# Altium PCB ScienceLEDBoard.PcbDoc
Units mm, origin at the board's own origin, x right, y up, seen from the top; angles counter-clockwise.
Board outline 16.5 x 16.5 mm, 2 copper layers (Top Layer, Bottom Layer), stack 1.586 mm thick; 8 components, 6 nets, 24 pads, 16 vias.
Unrouted connection lines stored in the file: 3.
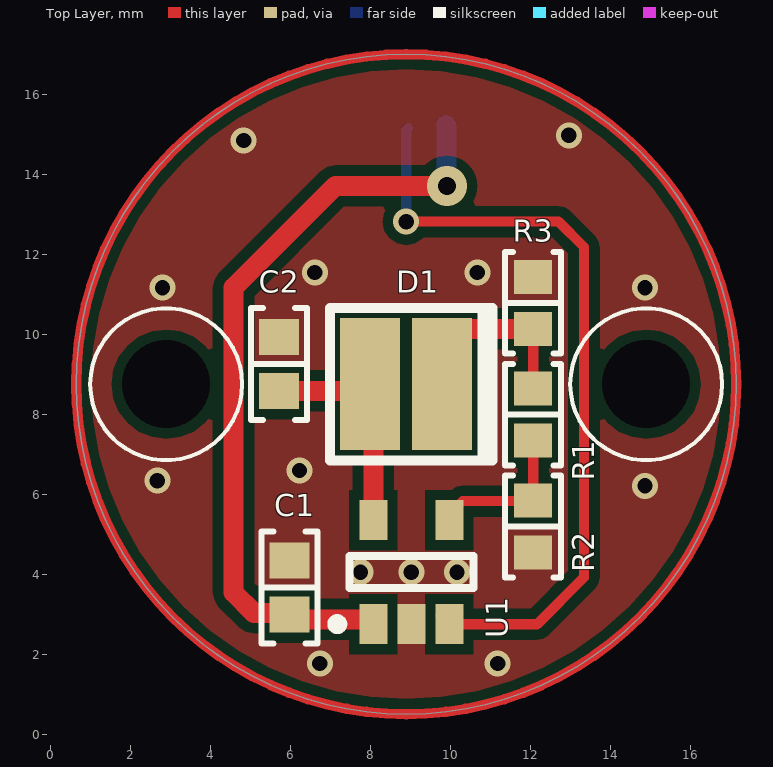
[diagram p0: Top Layer view]
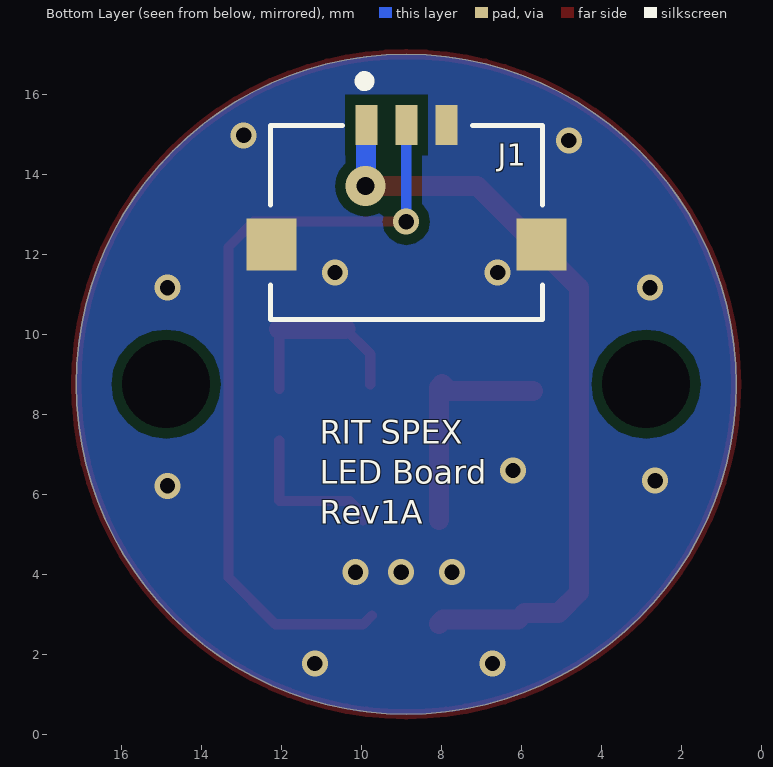
[diagram p1: Bottom Layer view, seen from below]
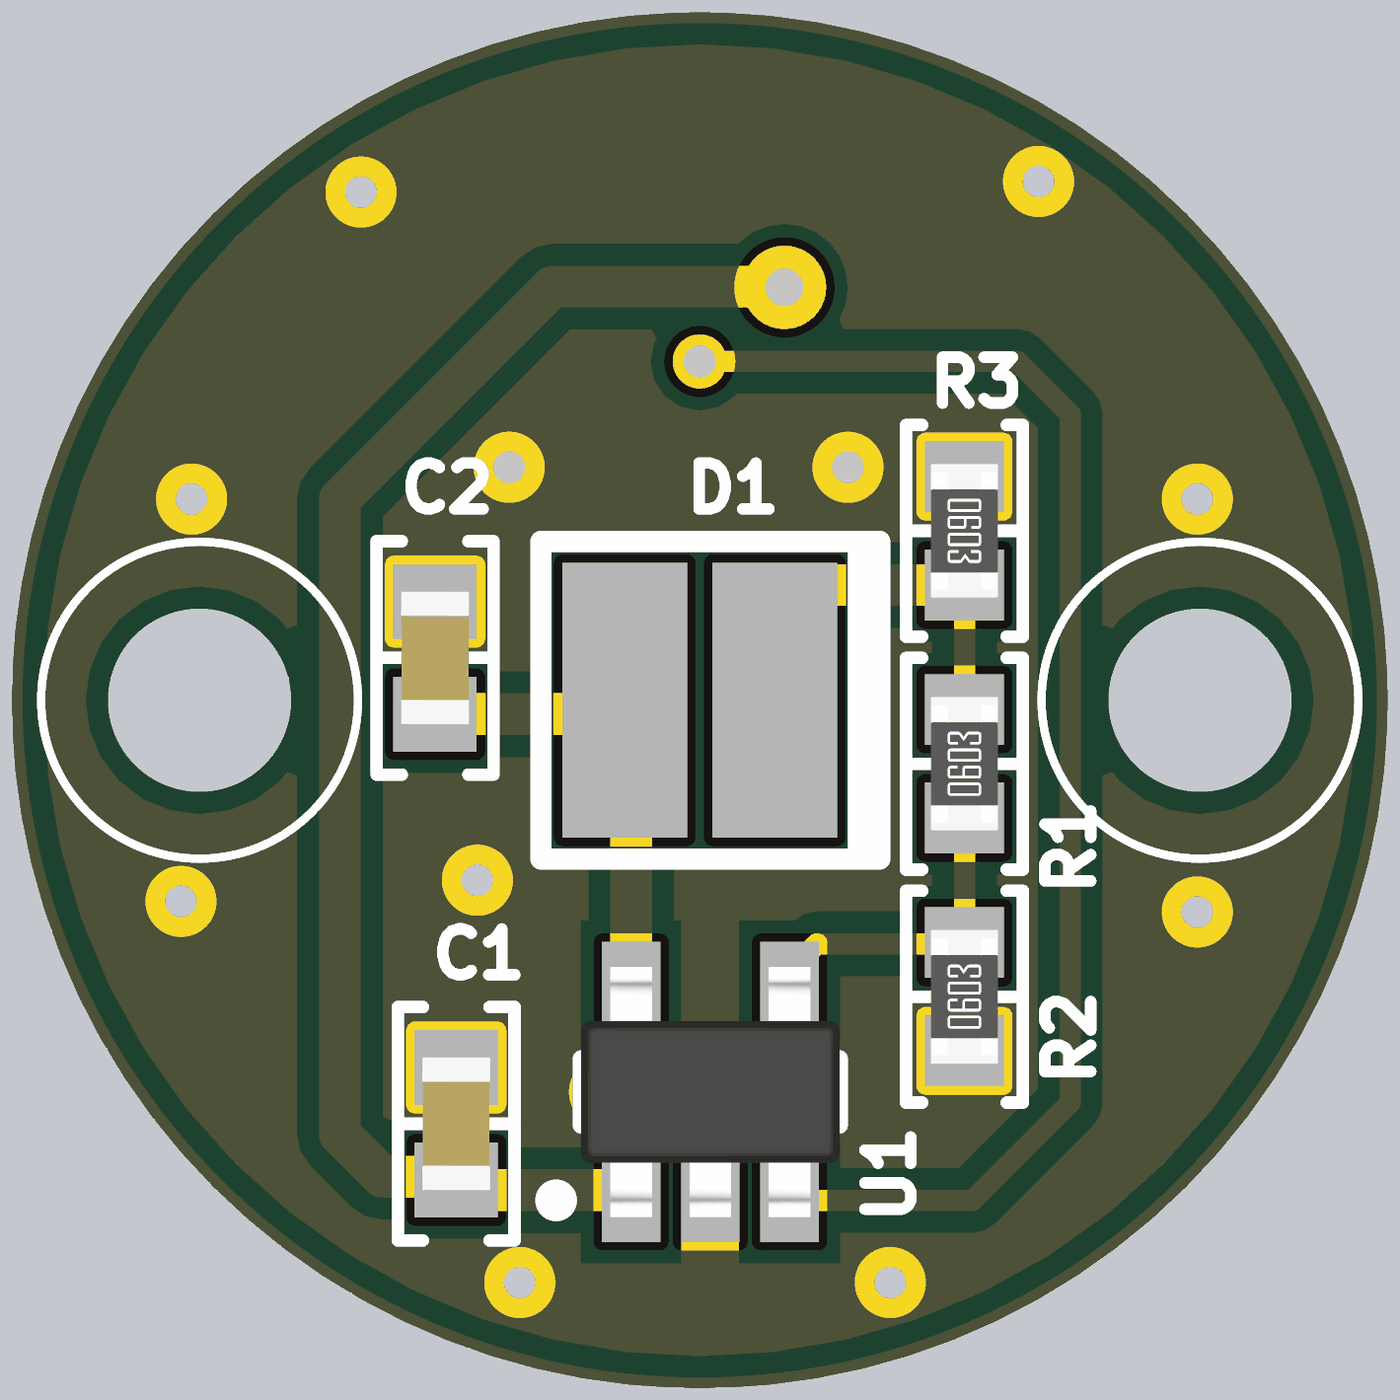
[diagram p2: 3D render of the assembled board from above, using the file's embedded part models]

## Layer stack, top to bottom
Top Solder: solder mask 0.0102, Solder Resist, Dk 3.5
Top Layer: signal copper 0.043
Dielectric 1: dielectric 1.5, FR-4, Dk 4.4
Bottom Layer: signal copper 0.043
Bottom Solder: solder mask 0.0102, Solder Resist, Dk 3.5

## Board outline
0.64,8.763 ccw(c8.89,8.763) 8.89,0.513 ccw(c8.89,8.763) 17.14,8.763 ccw(c8.89,8.763) 8.89,17.013 ccw(c8.89,8.763)

## Design rules (kind name [scope] priority, off if disabled: settings)
Clearance [All] p1: gap=0.254 ignorepadtopadclearanceinfootprint=FALSE except(0: Arc-Hole Track-Hole SMDPad-Hole THPad-Hole Via-Hole Fill-Hole Poly-Hole Region-Hole Text-Hole)
PolygonConnect [All] p1: connectstyle=Direct reliefconductorwidth=0.254 reliefentries=4 polygonreliefangle="90 Angle" airgapwidth=0.254
RoomDefinition SCIENCE_LED_BOARD [InComponentClass('SCIENCE_LED_BOARD')] p1: confinementstyle=ConfineIn formatcopy=TRUE lockcomponents=FALSE outline 0,0 17.526,0 17.526,17.272 0,17.272
RoutingVias [All] p1: holewidth=0.711 width=1.27 viastyle="Through Hole" minholewidth=0.711 minwidth=1.27 maxholewidth=0.711 maxwidth=1.27
SilkToSilkClearance [All] p1: silktosilkclearance=0.127
SilkToSolderMaskClearance [IsPad] p1: minsilkscreentomaskgap=0.127 clearancetoexposedcopper=TRUE
SolderMaskExpansion [All] p1: expansion=0.102
Width [All] p1: maxlimit=1 minlimit=0.254 preferedwidth=0.254
28 further rules are at their usual default settings.

## Components (designator, comment, footprint, x,y, rotation, side; value= is the part's Value field where it differs from the comment)
C1 "1µF" "CAP 0603_1608" 5.969,3.683 r270 top
C2 "1µF" "CAP 0603_1608" 5.715,9.271 r270 top
D1 "=VALUE" "PCB - LED - VISHAY 1414_3535 UV" 8.89,8.763 r0 top
J1 "SCH - CONNECTORS - 3 PIN + SHIELD" "PCB - CONNECTOR - MOLEX - PICO-LOCK 5037630391" 8.89,15.24 r180 bottom
R1 "7.15 kOhms" "RES 0603_1608" 12.065,8.001 r90 top
R2 "12 kOhms" "RES 0603_1608" 12.065,5.207 r90 top
R3 "47 Ohms" "RES 0603_1608" 12.065,10.795 r270 top
U1 "AP2204K-ADJTRG1" DIOD-SOT23-5_V 9.017,4.064 r90 top

## Footprints (in the part's own frame and the unit in brackets; to place one, negate y for a bottom-side part, rotate by r counter-clockwise, add the part's x,y. Pads: shape width x height; smd on the part's side, far side on the other; paste and mask are expansions set on the pad)
"CAP 0603_1608" [mm] "Chip Capacitor, 2-Leads, Body 1.60x0.80mm, IPC Medium Density"
  rect 0.9x1 smd: 1(-0.675,0) 2(0.675,0)
  silkscreen extent -1.4,-0.7 1.4,0.7, body extent -0.8,-0.41 0.8,0.41, height 0.82
DIOD-SOT23-5_V [mm] "SOT23, 5-Leads, Body 3.1x1.7mm, Pitch 0.95mm"
  rect 1x0.7 smd: 1(-1.3,0.95) 2(-1.3,0) 3(-1.3,-0.95) 4(1.3,-0.95) 5(1.3,0.95)
  silkscreen extent -1.42,-1.55 0.4,1.97, body extent -1.5,-1.55 1.5,1.55, height 1.45
"PCB - CONNECTOR - MOLEX - PICO-LOCK 5037630391" [mm]
  rect 0.55x1 smd: 1(-0.992,0) 2(0.008,0) 3(1.008,0)
  rect 1.26x1.3 smd: S1(3.383,-2.99) S2(-3.367,-2.99)
  silkscreen extent -3.39,-4.86 3.41,1.2, body extent -3.82,-4.88 3.78,0.31, height 1.47
"PCB - LED - VISHAY 1414_3535 UV" [mm] "PCB - LED - VISHAY 1414_3535 UV"
  rect 1.5x3.3 smd: 1(-0.9,0) 2(0.9,0)
  silkscreen extent -1.91,-1.91 2.16,1.91
"RES 0603_1608" [mm] "Chip Resistor, 2-Leads, Body 1.60x0.80mm, IPC Medium Density"
  rect 0.85x0.95 smd: 1(-0.65,0) 2(0.65,0)
  silkscreen extent -1.27,-0.7 1.27,0.7, body extent -0.8,-0.4 0.8,0.4, height 0.45

## Part data
C1 C2: library part CC0603KRX5R8BB105, "CAP CER 1UF 25V X5R 0603", Device Package="0603 (1608 Metric)", Manufacturer=Yageo, Operating Temperature="-55°C ~ 85°C", Supplier Part Number 1=311-1445-1-ND, Temperature Coefficient=X5R, Tolerance=±10%, Voltage - Rated=25V, Applications="General Purpose", Capacitance=1µF, ComponentLink1Description=Datasheet, ComponentLink1URL=https://www.yageo.com/upload/media/product/productsearch/datasheet/mlcc/UPY-GPHC_X5R_4V-to-50V_25.pdf, ComponentLink2Description="DigiKey Link", ComponentLink2URL=http://digikey.com/product-detail/en/yageo/CC0603KRX5R8BB105/311-1445-1-ND/2833751, LastUpdated="1/21/2020 12:02:05 AM", Lifecycle Status=Active, Minimum Order=1, Mounting Type="Surface Mount, MLCC", Package / Case="0603 (1608 Metric)", Packaging=TapeAndReel, PartId=5146, Part Number=CC0603KRX5R8BB105, Part Status=Active, Price=0.01, Series=CC, Size / Dimension="0.063\" L x 0.031\" W (1.60mm x 0.80mm)", Supplier 1=DigiKey, Thickness (Max)="0.035\" (0.90mm)"
D1: library part LED, "Chip LED"
J1: "Connector Header Surface Mount, Right Angle 4 position 0.039 _1.00mm_", Package=None, Availability=Unavailable, MF=Molex, MP=5037630491, Price=None, SnapEDA_Link=https://www.snapeda.com/parts/5037630491/Molex/view-part/3215405/?ref=snap
R1: library part RMCF0603FT7K15, "RES 7.15K OHM 1% 1/10W 0603", Device Package="0603 (1608 Metric)", Manufacturer="Stackpole Electronics Inc", Operating Temperature="-55°C ~ 155°C", Power (Watts)="0.1W, 1/10W", Ratings=AEC-Q200, Supplier Device Package=0603, Supplier Part Number 1=RMCF0603FT7K15CT-ND, Temperature Coefficient=±100ppm/°C, Tolerance=±1%, ComponentLink1Description=Datasheet, ComponentLink1URL=https://www.seielect.com/catalog/sei-packaging.pdf, ComponentLink2Description="DigiKey Link", ComponentLink2URL=http://digikey.com/product-detail/en/stackpole-electronics-inc/RMCF0603FT7K15/RMCF0603FT7K15CT-ND/1943048, Composition="Thick Film", Features="Automotive AEC-Q200", Height - Seated (Max)="0.022\" (0.55mm)", LastUpdated="1/21/2020 12:17:41 AM", Lifecycle Status=Active, Minimum Order=1, Number of Terminations=2, Package / Case="0603 (1608 Metric)", Packaging=CutTape, PartId=22551, Part Number=RMCF0603FT7K15, Part Status=Active, Price=0.10, Resistance="7.15 kOhms", Series=RMCF, Size / Dimension="0.061\" L x 0.031\" W (1.55mm x 0.80mm)", Supplier 1=DigiKey
R2: library part RMCF0603FT12K0, "RES 12K OHM 1% 1/10W 0603", Device Package="0603 (1608 Metric)", Manufacturer="Stackpole Electronics Inc", Operating Temperature="-55°C ~ 155°C", Power (Watts)="0.1W, 1/10W", Ratings=AEC-Q200, Supplier Device Package=0603, Supplier Part Number 1=RMCF0603FT12K0CT-ND, Temperature Coefficient=±100ppm/°C, Tolerance=±1%, ComponentLink1Description=Datasheet, ComponentLink1URL=https://www.seielect.com/catalog/sei-rmcf_rmcp.pdf, ComponentLink2Description="DigiKey Link", ComponentLink2URL=http://digikey.com/product-detail/en/stackpole-electronics-inc/RMCF0603FT12K0/RMCF0603FT12K0CT-ND/1943062, Composition="Thick Film", Features="Automotive AEC-Q200", Height - Seated (Max)="0.022\" (0.55mm)", LastUpdated="1/21/2020 12:22:42 AM", Lifecycle Status=Active, Minimum Order=1, Number of Terminations=2, Package / Case="0603 (1608 Metric)", Packaging=CutTape, PartId=10636, Part Number=RMCF0603FT12K0, Part Status=Active, Price=0.10, Resistance="12 kOhms", Series=RMCF, Size / Dimension="0.061\" L x 0.031\" W (1.55mm x 0.80mm)", Supplier 1=DigiKey
R3: library part RMCF0603FT47R0, "RES 47 OHM 1% 1/10W 0603", Device Package="0603 (1608 Metric)", Manufacturer="Stackpole Electronics Inc", Operating Temperature="-55°C ~ 155°C", Power (Watts)="0.1W, 1/10W", Ratings=AEC-Q200, Supplier Device Package=0603, Supplier Part Number 1=RMCF0603FT47R0CT-ND, Temperature Coefficient=±100ppm/°C, Tolerance=±1%, ComponentLink1Description=Datasheet, ComponentLink1URL=https://www.seielect.com/catalog/sei-rmcf_rmcp.pdf, ComponentLink2Description="DigiKey Link", ComponentLink2URL=http://digikey.com/product-detail/en/stackpole-electronics-inc/RMCF0603FT47R0/RMCF0603FT47R0CT-ND/1942954, Composition="Thick Film", Features="Automotive AEC-Q200", Height - Seated (Max)="0.022\" (0.55mm)", LastUpdated="1/21/2020 12:22:37 AM", Lifecycle Status=Active, Minimum Order=1, Number of Terminations=2, Package / Case="0603 (1608 Metric)", Packaging=CutTape, PartId=10672, Part Number=RMCF0603FT47R0, Part Status=Active, Price=0.10, Resistance="47 Ohms", Series=RMCF, Size / Dimension="0.061\" L x 0.031\" W (1.55mm x 0.80mm)", Supplier 1=DigiKey
U1: library part CMP-2000-05784-1, "Wide Input Voltage Range, Adjustable Output, 150 mA, -40 to 125 degC, 5-Pin SOT23, RoHS, Tape and Reel", Dropout Voltage - Max=500mV, Input Voltage MAX=24V, Input Voltage MIN=2.3V, Manufacturer=DiodesIncorporated, Maximum Operating Temperature=+85C, Minimum Operating Temperature=-40C, Output Current=200mA, Output Voltage=Adj, Package / Case=SOT-23-5, Package Description="5-Pin Small Outline Transistor, Body 2.96 x 1.6 mm, Pitch 0.95 mm", Package Reference=SOT23-5, Reference Voltage=1.24V, Brand=DiodesIncorporated, Datasheet URL=https://www.diodes.com/_files/datasheets/AP2204.pdf, Datasheet Version="Rev. 3-2, 06/2016", Factory Pack Quantity=3000, Line Regulation=0.05%, Load Regulation=0.5%, Manufacturer URL=http://www.diodes.com/, Mounting Style=SMD/SMT, Mounting Technology=SurfaceMount, Number of Outputs=1Output, Output Type=Adjustable, Packaging=Reel, Product=LDORegulators, Product Category=LDOVoltageRegulators, PSRR / Ripple Rejection - Typ=60dB, RoHS=True, Series=AP2204K, Type=ULDORegulator, Unit Weight=0.001058oz

## Free pads (board coordinates)
  round 1.524 hole 2.2 unplated: 6(2.89,8.763) 7(14.89,8.763)

## Via types
v1: diameter 0.65, hole 0.381, Top Layer to Bottom Layer, 15 vias
v2: diameter 1, hole 0.45, Top Layer to Bottom Layer, 1 vias

## Nets (pads, with @x,y where several pads share a name; then routed paths per layer and width w, separated by ;. In a path a pad name is that pad's centre, name@x,y a point inside that pad or via, vN(x,y) a via of type N, cw(c..) or ccw(c..) an arc to the next point about the centre after c; other vN are vias at no path point)
+12: C1.2 J1.1 U1.1 | length 19.4
  Top Layer w0.5: U1.1 8.067,2.786 7.967,2.886 6.091,2.886 C1.2 5.929,3.048 5.08,3.048 4.572,3.556 4.572,11.176 7.12,13.724 9.898,13.724 v2(9.906,13.716)
  Bottom Layer w0.5: J1.1 9.894,15.228 9.894,13.728 v2(9.906,13.716)
GND: C1.1 C2.1 J1.3 J1.S1 J1.S2 R2.1 R3.1 U1.2
  other v1: 6.731,1.778 11.176,1.778 7.747,4.064 9.017,4.064 10.16,4.064 14.859,6.223 2.667,6.35 6.223,6.604 2.794,11.176 14.859,11.176 6.604,11.557 10.668,11.557 4.826,14.859 12.954,14.986
NetC2_2: C2.2 D1.1 U1.5 | length 5.8
  Top Layer w0.5: C2.2 7.823,8.596 D1.1 8.067,8.686 U1.5
NetD1_2: D1.2 R1.2 R3.2 | length 4.8
  Top Layer w0.254: D1.2 9.79,9.522 D1.2@10.413,10.145 ; R1.2 R3.2
  Top Layer w0.5: D1.2@10.413,10.145 R3.2
NetJ1_2: J1.2 U1.3 | length 19.5
  Top Layer w0.254: v1(8.89,12.827) 12.7,12.827 13.335,12.192 13.335,3.937 12.162,2.764 U1.3 U1.3@9.748,2.983
  Bottom Layer w0.254: v1(8.89,12.827) 8.89,15.113 J1.2@8.949,15.172
NetR1_1: R1.1 R2.2 U1.4 | length 3.9
  Top Layer w0.254: U1.4 9.967,5.514 10.295,5.842 12.05,5.842 R2.2 R1.1
copper on no net: | length 51.8
  Top Layer w0.254: 17.14,8.763 ccw(c8.89,8.763) 17.14,8.763

## Polygon pours and split planes (outlines as drawn)
GND on Bottom Layer "Top Layer-No Net1" (solid, pour order 12): 0.64,8.763 ccw(c8.89,8.763) 8.89,0.513 ccw(c8.89,8.763) 17.14,8.763 ccw(c8.89,8.763) 8.89,17.013 ccw(c8.89,8.763)
GND on Top Layer "Top Layer-No Net2" (solid, pour order 13): 0.64,8.763 ccw(c8.89,8.763) 8.89,0.513 ccw(c8.89,8.763) 17.14,8.763 ccw(c8.89,8.763) 8.89,17.013 ccw(c8.89,8.763)

## Silkscreen, mask and mechanical layers (free items; w line width, h text height)
Top Overlay:
  circle w0.1: c14.89,8.763 r1.9
  circle w0.1: c2.89,8.763 r1.9
Bottom Overlay:
  text "RIT SPEX / LED Board / Rev1A" at 11.049,5.08 h1